# Altium PCB tiny_control.PcbDoc
Units mm, origin at the board's own origin, x right, y up, seen from the top; angles counter-clockwise.
Board outline 74.25 x 44.25 mm, 2 copper layers (Top Layer, Bottom Layer); 35 components, 21 nets, 94 pads, 4 vias.
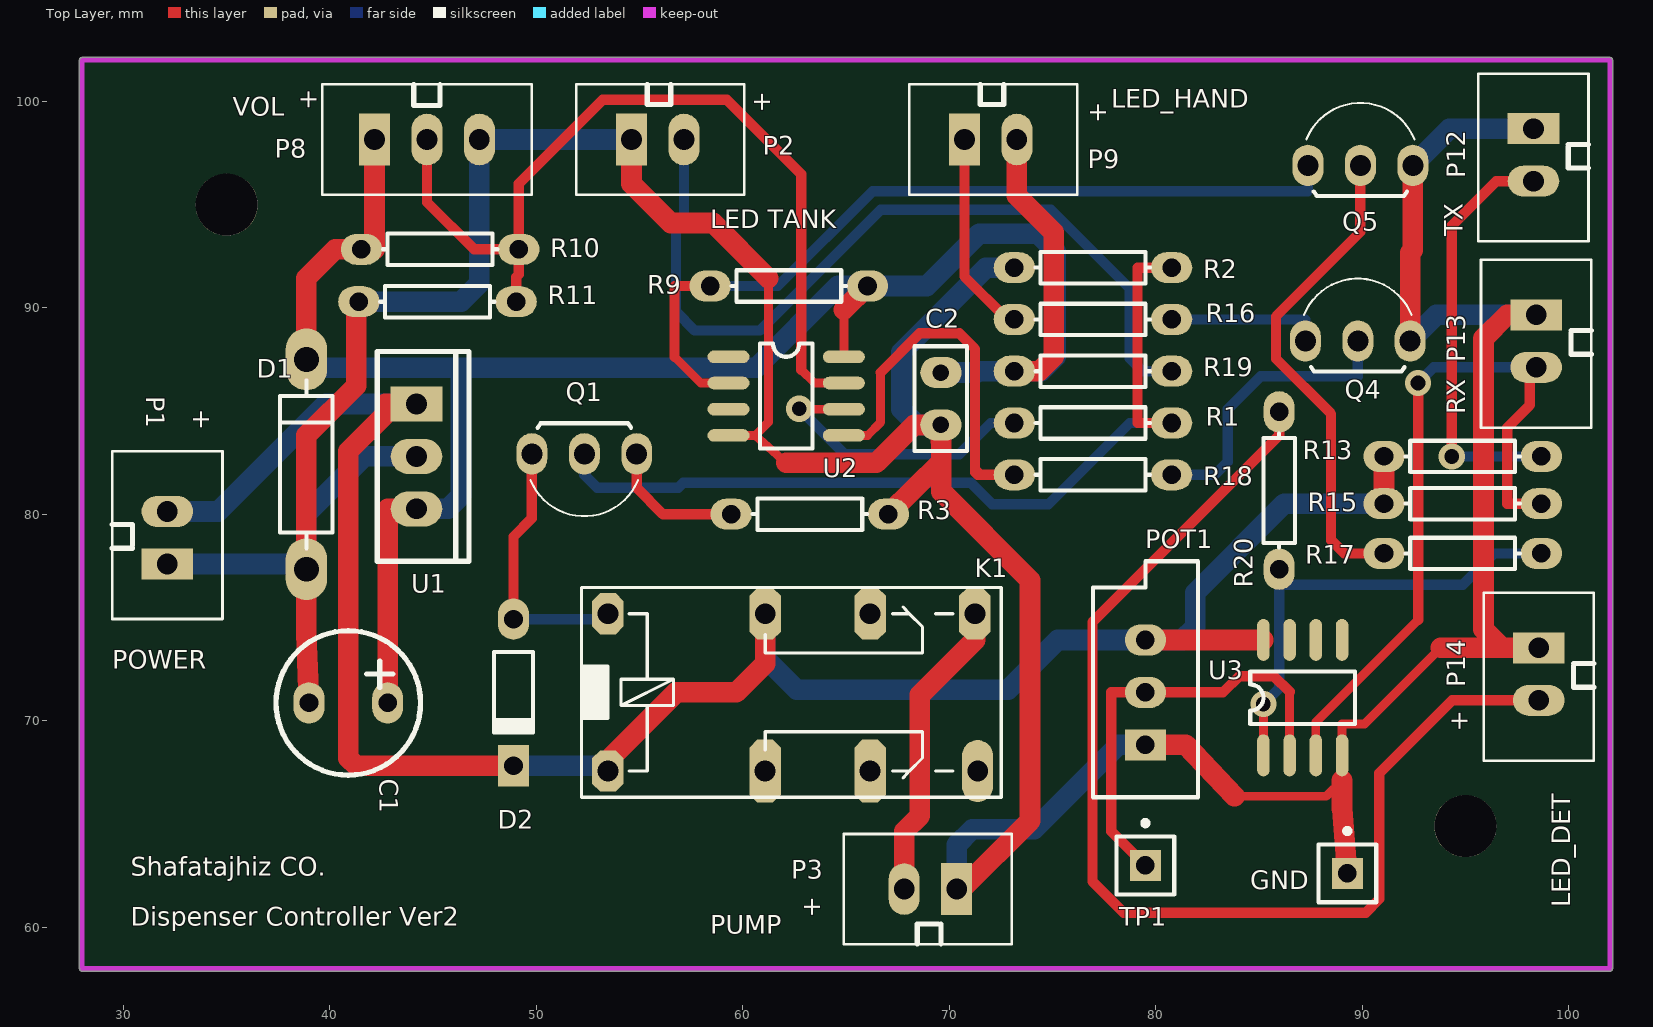
[diagram p0: Top Layer view]
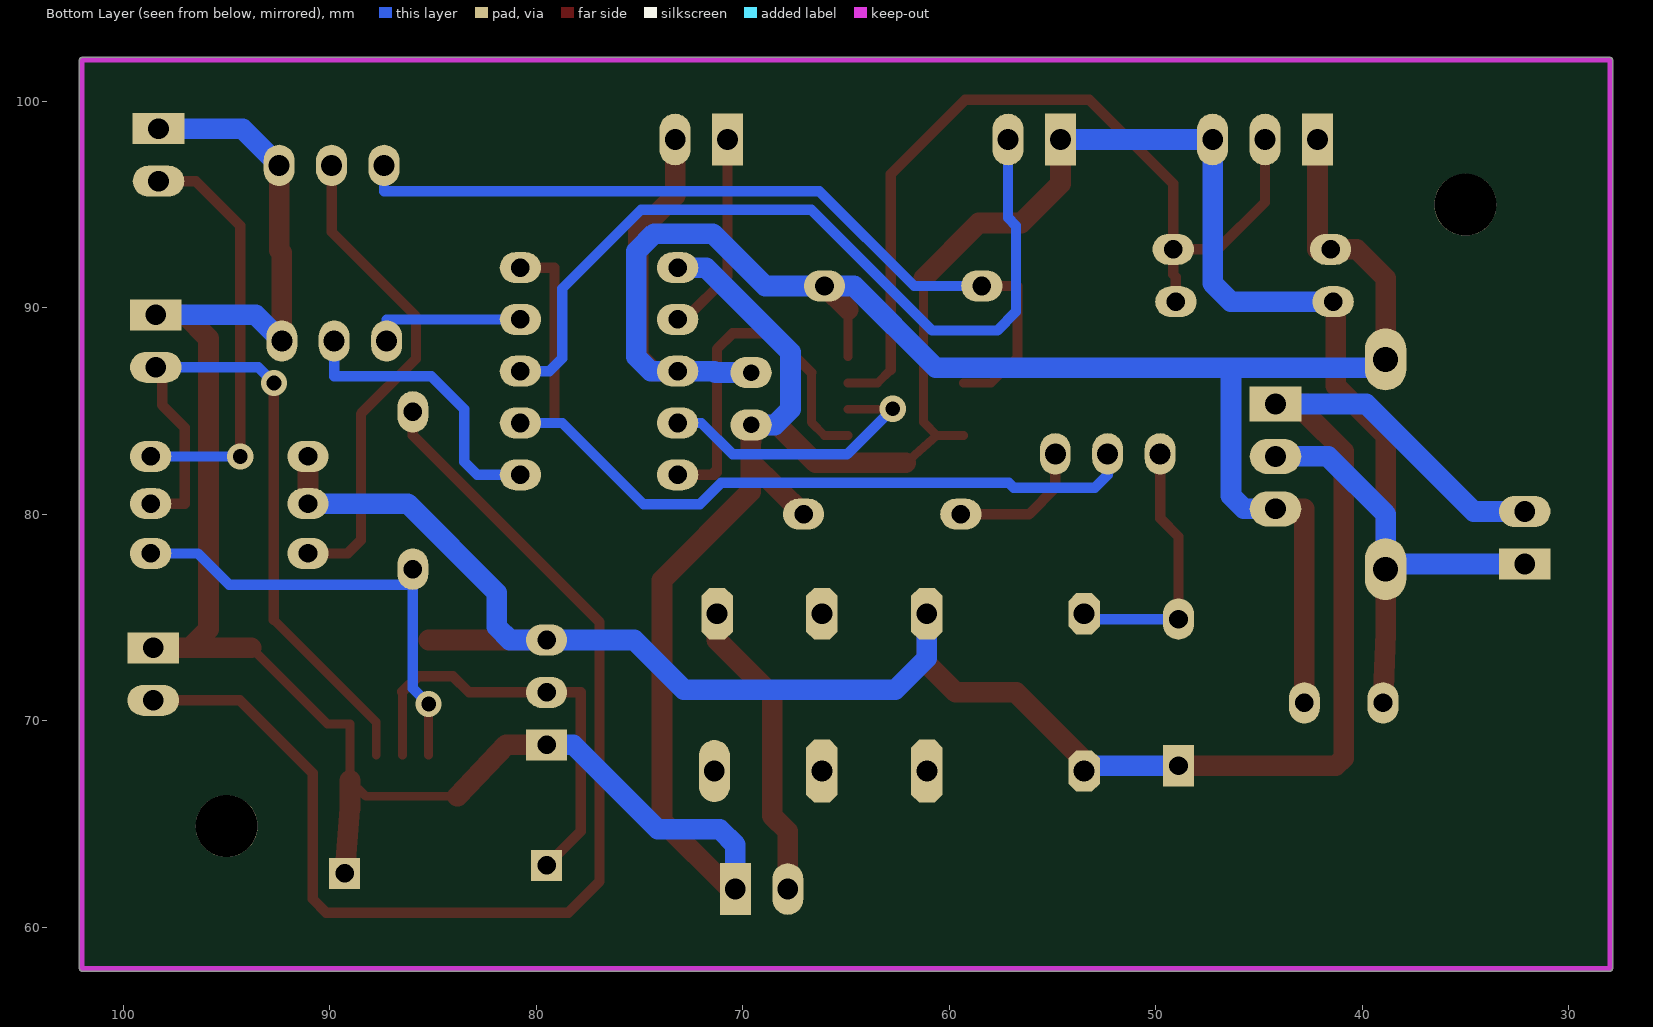
[diagram p1: Bottom Layer view, seen from below]

## Layer stack, top to bottom
Top Solder: solder mask 0.0102, Solder Resist, Dk 3.5
Top Layer: signal copper 0.0356
Dielectric 1: dielectric 0.32, FR-4, Dk 4.8
Bottom Layer: signal copper 0.0356
Bottom Solder: solder mask 0.0102, Solder Resist, Dk 3.5

## Board outline
28,57.873 cw(c28,58) 27.873,58 27.873,102 cw(c28,102) 28,102.127 102,102.127 cw(c102,102) 102.127,102 102.127,58 cw(c102,58) 102,57.873

## Design rules (kind name [scope] priority, off if disabled: settings)
Clearance [All] p1: gap=0.4
PolygonConnect [All] p1: connectstyle=Relief reliefconductorwidth=0.254 reliefentries=4 polygonreliefangle="90 Angle" airgapwidth=0.254
RoutingVias [All] p1: holewidth=0.711 width=1.27 viastyle="Through Hole" minholewidth=0.711 minwidth=1.27 maxholewidth=0.711 maxwidth=1.27
SMDNeckDown [All] p1: percent=70.000
SolderMaskExpansion [All] p1: expansion=0.102
Width [(InNet('5V') OR InNet('12V') OR InNet('GND'))] p1: maxlimit=2 minlimit=0.4 preferedwidth=1 minimp=50.000000 maximp=50.000000 favimp=50.000000
Width Width_1 [All] p2: maxlimit=2 minlimit=0.4 preferedwidth=0.5 minimp=50.000000 maximp=50.000000 favimp=50.000000
29 further rules are at their usual default settings.

## Components (designator, comment, footprint, x,y, rotation, side; value= is the part's Value field where it differs from the comment)
C1 "35v 100u" cap5 40.894,70.866 r180 top
C2 "Cap" RAD-0.1 69.596,85.598 r270 top
D1 "p6ke15a" DIODE-0.4 38.862,82.423 r90 top
D2 "1n4007" DIO7.1-3.9x1.9 48.895,71.374 r270 top
GND "test point" PIN1 89.281,62.611 r0 top (schematic designator TP2)
K1 "Relay-DPDT" My_REL_cochick 57.277,71.374 r0 top
P1 "POWER" con2_2.54 32.258,78.994 r270 top
P2 "LED TANK" con2_2.54 56.007,98.028 r180 top
P3 "PUMP" con2_2.54 68.961,61.976 r0 top
P8 "VOL" con3_2.54 44.704,98.155 r180 top
P9 "LED_HAND" con2_2.54 72.136,98.028 r180 top
P12 "TX" con2_2.54 98.171,97.282 r90 top
P13 "RX" con2_2.54 98.298,88.265 r90 top
P14 "LED_DET" con2_2.54 98.425,72.136 r90 top
POT1 "Res Tap" VR5 79.502,71.374 r90 top
Q1 "2N3904" TO-92C 52.324,82.931 r270 top
Q4 "5401" TO-92C 89.789,88.392 r90 top
Q5 "5401" TO-92C 89.916,96.901 r90 top
R1 "Res1" AXIAL-0.3 76.962,84.423 r0 top
R2 "Res1" AXIAL-0.3 76.962,91.948 r0 top
R3 "Res1" AXIAL-0.3 63.246,80.01 r180 top
R9 "Res1" AXIAL-0.3 62.23,91.059 r180 top
R10 "Res1" AXIAL-0.3 45.339,92.837 r0 top
R11 "Res1" AXIAL-0.3 45.212,90.297 r0 top
R13 "Res1" AXIAL-0.3 94.869,82.804 r180 top
R15 "Res1" AXIAL-0.3 94.869,80.518 r180 top
R16 "Res1" AXIAL-0.3 76.962,89.44 r0 top
R17 "Res1" AXIAL-0.3 94.869,78.105 r180 top
R18 "Res1" AXIAL-0.3 76.962,81.915 r0 top
R19 "Res1" AXIAL-0.3 76.962,86.931 r180 top
R20 "Res1" AXIAL-0.3 85.979,81.153 r270 top
TP1 "test point" PIN1 79.502,62.992 r0 top
U1 "7805" TO-220 44.196,80.264 r270 top
U2 "ATtiny11-6PI" SOIC-8 59.309,87.63 r0 top
U3 "LM358D" SOIC-8 85.217,68.326 r90 top

## Footprints (in the part's own frame and the unit in brackets; to place one, negate y for a bottom-side part, rotate by r counter-clockwise, add the part's x,y. Pads: shape width x height; smd on the part's side, far side on the other; paste and mask are expansions set on the pad)
AXIAL-0.3 [mm] "Axial Device, Thru-Hole; 2 Leads; 0.3 in Pin Spacing"
  oval 2x1.5 hole 0.9: 1(-3.81,0) 2(3.81,0)
  silkscreen extent -2.77,-0.76 2.77,0.76
cap5 [mm]
  oval 1.5x2 hole 0.9: 1(-1.905,0) 2(1.905,0)
  silkscreen extent -3.5,-3.5 3.5,3.5
con2_2.54 [mm]
  rect 1.5x2.5 hole 1: 1(1.397,-0.127)
  oval 1.5x2.5 hole 1: 2(-1.143,-0.127)
  silkscreen extent -4.06,-2.79 4.06,2.54, body extent -2.26,-2.63 2.52,2.37, height 11.3
con3_2.54 [mm]
  rect 1.5x2.5 hole 1: 1(2.54,0)
  oval 1.5x2.5 hole 1: 2(0,0) 3(-2.54,0)
  silkscreen extent -5.08,-2.67 5.08,2.67, body extent -3.76,-2.5 3.56,2.5, height 11.3
DIO7.1-3.9x1.9 [mm] "Diode, Axial; Body 3.8 x 1.9 mm (LxDia. max), Lead Dia. 0.53 mm (max)"
  oval 2x1.5 hole 0.9: 1(-3.55,0)
  rect 2x1.5 hole 0.9: 2(3.55,0)
  silkscreen extent -1.95,-0.95 2.05,0.95
DIODE-0.4 [mm] "Diode, Thru-Hole; 2 Leads; 0.4 in Pin Spacing"
  oval 3x2 hole 1.2: 1(-5.08,0) 2(5.08,0)
  silkscreen extent -4.06,-1.27 4.06,1.27
My_REL_cochick [mil]
  oct 60x98.43 hole 39.37: 1(150,150)
  oct 60x98.43 hole 40: 2(350,150) 3(550,150)
  oct 60x120 hole 40: 4(150,-150) 5(350,-150)
  oct 60x78.74 hole 40: 7(-150,150) 8(-150,-150)
  silkscreen extent -200,-200 600,200
PIN1 [mm] "Connector; Plug"
  rect 1.5x1.5 hole 0.9: 1(0,0)
  silkscreen extent -1.4,-1.4 1.4,2.17
RAD-0.1 [mm] "Radial Cap, Thru-Hole; 2 Leads; 0.1 in Pin Spacing"
  oval 1.5x2 hole 0.8: 1(-1.27,0) 2(1.27,0)
  silkscreen extent -2.54,-1.27 2.54,1.27
SOIC-8 [mil]
  oval 80x24 smd: 1(0,0) 2(0,-50) 3(0,-100) 4(0,-150) 5(220,-150) 6(220,-100) 7(220,-50) 8(220,0)
  silkscreen extent 60,-175 160,25
TO-92C [mm]
  oval 2x1.5 hole 1.016: 1(0,2.54) 2(0,0) 3(0,-2.54)
  silkscreen extent -1.48,-2.61 3.02,2.61
TO-220 [mm]
  rect 1.7x2.5 hole 1.001: 1(-5.08,0)
  oval 1.7x2.5 hole 1.001: 2(-2.54,0) 3(0,0)
  silkscreen extent -7.62,-1.91 2.54,2.54
VR5 [mm] "Thru-Hole; 3 Leads"
  rect 1.5x2 hole 0.9: 1(-2.54,0)
  oval 1.5x2 hole 0.9: 2(0,0) 3(2.54,0)
  silkscreen extent -5.08,-2.54 6.35,2.54

## Part data
C1: library part "Cap Pol1", "ELECTROLITE 25V"
C2: "Capacitor"
D1 D2: library part "Diode 1N4148", "High Conductance Fast Diode"
GND TP1: library part Plug, "Plug"
K1: "Dual-Pole Dual-Throw Relay"
P1 P2 P3 P9 P12 P13 P14: library part "Header 2", "Header, 2-Pin"
P8: library part "Header 3", "Header, 3-Pin"
POT1: "Tapped Resistor"
Q1: "NPN General Purpose Amplifier"
Q4 Q5: library part P2N2222A, "Transistor"
R1 R2 R3 R9 R10 R11 R13 R15 R16 R17 R18 R19 R20: "Resistor"
U1: "Regulator"
U2: "AVR 1K Byte of Flash Memory"
U3: "Dual Low-Power Operational Amplifier"

## Free pads (board coordinates)
  oval 1.5x3 hole 1: 0(71.374,67.564)
  round 3 hole 3: 1(35,94.996) 3(95,64.897)

## Via types
v1: diameter 1.27, hole 0.711, Top Layer to Bottom Layer, 4 vias

## Nets (pads, with @x,y where several pads share a name; then routed paths per layer and width w, separated by ;. In a path a pad name is that pad's centre, name@x,y a point inside that pad or via, vN(x,y) a via of type N, cw(c..) or ccw(c..) an arc to the next point about the centre after c; other vN are vias at no path point)
5V: C1.1 C2.1 D1.2 P8.1 P9.2 R9.1 R10.1 R19.2 U1.3 U2.8 | length 100.6
  Top Layer w0.427: U2.8 64.897,89.916
  Top Layer w1: D1.2 38.862,91.44 40.259,92.837 R10.1 42.164,92.837 P8.1 ; C1.1 42.799,80.264 U1.3 ; 64.897,89.916 R9.1 ; R19.2 74.358,86.931 75.057,87.63 75.057,93.65 73.279,95.428 P9.2
  Bottom Layer w1: D1.2 38.862,87.097 46.355,87.097 ; U1.3 45.72,80.264 46.355,80.899 46.355,87.097 ; C2.1 71.323,86.868 71.387,86.931 R19.2 74.46,86.931 75.159,87.63 75.159,92.734 74.295,93.598 71.449,93.598 68.91,91.059 R9.1 64.615,91.059 60.653,87.097 46.355,87.097
12V: D2.2 K1.1 K1.8 P1.2 POT1.3 R13.2 R15.2 U1.1 U3.8 | length 104.6
  Top Layer w1: U1.1 42.678,85.344 42.678,84.834 40.894,83.05 40.894,68.199 41.275,67.818 48.895,67.818 D2.2 ; K1.8 53.467,68.072 56.769,71.374 59.69,71.374 61.087,72.771 K1.1 ; POT1.3 U3.8 ; R15.2 R13.2
  Bottom Layer w1: P1.2 34.595,80.137 39.802,85.344 U1.1 ; D2.2 53.467,67.824 K1.8 ; K1.1 61.087,73.025 62.611,71.501 72.847,71.501 75.26,73.914 POT1.3 81.28,73.914 81.915,74.549 81.915,76.2 86.233,80.518 R15.2
BUZ: R18.1 U2.5 | length 18.1
  Top Layer w0.427: U2.5 66.04,83.82 66.675,84.455 66.675,86.868
  Top Layer w0.5: 66.675,86.868 68.58,88.773 70.485,88.773 71.247,88.011 71.247,82.042 71.374,82.042 71.374,81.915 R18.1
GND: C1.2 C2.2 D1.1 GND.1 P1.1 P2.1 P3.1 P8.3 P12.1 P13.1 P14.1 POT1.1 Q4.3 Q5.3 R2.1 R3.1 R11.1 U1.2 U2.4 U3.4 | length 213.2
  Top Layer w0.427: U2.4 60.604,83.82 ; 61.239,91.44 61.239,84.455 60.604,83.82 ; 62.103,82.499 60.604,83.82 ; 83.82,66.345 88.265,66.345 89.027,67.107 U3.4 89.027,69.85 90.119,69.85 93.802,73.533
  Top Layer w1: C1.2 38.862,74.244 D1.1 38.862,83.82 41.275,86.233 41.275,90.297 R11.1 ; P2.1 54.61,96.012 56.515,94.107 58.572,94.107 61.239,91.44 ; 62.103,82.499 66.472,82.499 68.301,84.328 C2.2 ; R3.1 69.621,82.55 ; P3.1 70.612,61.849 73.914,65.151 73.914,76.81 69.621,81.102 69.621,82.55 ; POT1.1 81.458,68.834 83.82,66.345 ; 89.027,67.107 89.027,65.735 GND.1 ; Q4.3 92.329,92.659 92.456,92.786 Q5.3 ; 93.802,73.533 96.774,73.533 ; P13.1 97.028,89.662 95.879,88.513 95.879,74.428 96.774,73.533 ; P14.1 96.774,73.533 ; C2.2 69.621,84.328 69.621,82.55 ; C2.2 69.621,82.55
  Bottom Layer w1: P1.1 D1.1@38.862,77.597 ; D1.1 D1.1@38.862,77.597 ; R11.1 46.355,90.297 47.244,91.186 P8.3 P2.1 ; U1.2 41.656,82.804 38.862,80.01 D1.1@38.862,77.597 ; C2.2 68.453,84.328 67.691,85.09 67.691,87.856 71.783,91.948 R2.1 ; P3.1 70.358,63.983 71.12,64.745 74.117,64.745 78.207,68.834 POT1.1 ; Q4.3 93.599,89.662 P13.1 ; Q5.3 94.234,98.679 P12.1
NetD2_1: D2.1 K1.7 Q1.3 | length 13.2
  Top Layer w0.5: D2.1 48.895,78.918 49.784,79.807 Q1.3
  Bottom Layer w0.5: D2.1 53.467,74.924 K1.7
NetK1_3: K1.3 P3.2 | length 14.8
  Top Layer w1: P3.2 67.818,64.643 68.58,65.405 68.58,71.247 71.247,73.914 K1.3
NetP2_2: P2.2 R19.1 | length 40.5
  Bottom Layer w0.5: P2.2 57.15,94.361 56.769,93.98 56.769,89.811 57.68,88.9 60.83,88.9 66.678,94.748 74.93,94.748 78.74,90.938 78.74,87.566 79.375,86.931 R19.1
NetP9_1: P9.1 R16.1 | length 9.9
  Top Layer w0.5: P9.1 70.739,91.516 72.815,89.44 R16.1
NetP12_2: P12.2 R13.1 | length 20.4
  Top Layer w0.5: v1(94.336,82.804) 94.336,93.98 96.495,96.139 P12.2
  Bottom Layer w0.5: v1(94.336,82.804) R13.1
NetP13_2: P13.2 R15.1 U3.3 | length 35.1
  Top Layer w0.427: U3.3 87.757,69.937 92.71,74.89
  Top Layer w0.5: 92.71,74.89 v1(92.71,86.36) ; P13.2 98.12,87.122 98.12,85.292 97.029,84.201 97.029,80.518 R15.1
  Bottom Layer w0.5: v1(92.71,86.36) 93.472,87.122 P13.2
NetP14_2: P14.2 R20.1 | length 56.6
  Top Layer w0.5: R20.1 85.979,83.82 76.937,74.778 76.937,62.23 78.461,60.706 90.17,60.706 90.83,61.366 90.83,67.462 94.361,70.993 P14.2
NetPOT1_2: POT1.2 TP1.1 U3.2 | length 21.4
  Top Layer w0.427: U3.2 86.487,71.399
  Top Layer w0.5: TP1.1 77.851,64.643 77.851,71.374 POT1.2 83.261,71.374 84.049,72.161 85.725,72.161 86.487,71.399
NetQ1_1: Q1.1 R3.2 | length 6.7
  Top Layer w0.5: Q1.1 54.864,81.28 56.134,80.01 R3.2
NetQ1_2: Q1.2 R1.2 R2.2 | length 42.7
  Top Layer w0.5: R1.2 79.121,84.423 79.121,91.948 R2.2
  Bottom Layer w0.5: Q1.2 52.324,81.915 52.959,81.28 56.871,81.28 57.125,81.534 71.044,81.534 72.085,80.493 74.809,80.493 78.74,84.423 R1.2
NetQ4_1: Q4.1 R16.2 | length 7.5
  Bottom Layer w0.5: R16.2 87.249,89.44 Q4.1
NetQ4_2: Q4.2 R18.2 | length 14.2
  Bottom Layer w0.5: R18.2 82.855,81.915 83.49,82.55 83.49,85.09 85.09,86.69 89.789,86.69 Q4.2
NetQ5_2: Q5.2 R17.2 | length 23.8
  Top Layer w0.5: Q5.2 89.916,93.675 85.827,89.586 85.827,87.528 88.494,84.861 88.494,78.74 89.129,78.105 R17.2
NetR17_1: R17.1 R20.2 U3.1 | length 22.7
  Top Layer w0.427: U3.1 v1(85.217,70.815)
  Bottom Layer w0.5: v1(85.217,70.815) 85.979,71.577 R20.2@85.979,76.581 ; R20.2 R20.2@85.979,76.581 ; R17.1 96.393,78.105 94.869,76.581 R20.2@85.979,76.581
RLY: R1.1 U2.6 | length 14.1
  Top Layer w0.427: v1@62.763,85.09 U2.6
  Top Layer w0.5: v1(62.738,85.115) v1@62.763,85.09
  Bottom Layer w0.5: v1(62.738,85.115) 64.948,82.906 70.485,82.906 72.003,84.423 R1.1
SW: Q5.1 R9.2 U2.2 | length 40.4
  Top Layer w0.427: 56.693,87.63 57.963,86.36 U2.2
  Top Layer w0.5: 56.693,87.63 56.693,91.059 R9.2
  Bottom Layer w0.5: R9.2 61.697,91.059 66.286,95.648 87.376,95.648 Q5.1
VOL: P8.2 R10.2 R11.2 U2.7 | length 42.9
  Top Layer w0.427: 62.84,86.995 63.475,86.36 U2.7
  Top Layer w0.5: P8.2 44.704,95.123 46.99,92.837 R10.2 ; R11.2 49.022,91.491 49.149,91.618 R10.2 ; 62.84,86.995 62.84,96.469 59.233,100.076 53.213,100.076 49.149,96.012 R10.2
pads on no net: K1.2 K1.4 K1.5 U2.1 U2.3 U3.5 U3.6 U3.7

## Keep-outs
Keep-Out Layer:
  lines w0.254: 28,58 28,102 102,102 102,58 28,58

## Silkscreen, mask and mechanical layers (free items; w line width, h text height)
Top Overlay:
  text "+" at 39.37,99.568 h0.9 r90
  text "+" at 61.341,99.441 h0.9 r90
  text "+" at 77.597,98.933 h0.9 r90
  text "+" at 34.163,84.074 h0.9 r90
  text "+" at 95.123,69.469 h0.9 r90
  text "Shafatajhiz CO." at 30.353,62.484 h0.9
  text "+" at 63.754,60.452 h0.9 r90
  text "Dispenser Controller Ver2" at 30.353,60.071 h0.9